# EAGLE board SparkFun_Qwiic_Audio_Amp (EAGLE 9.6.2)
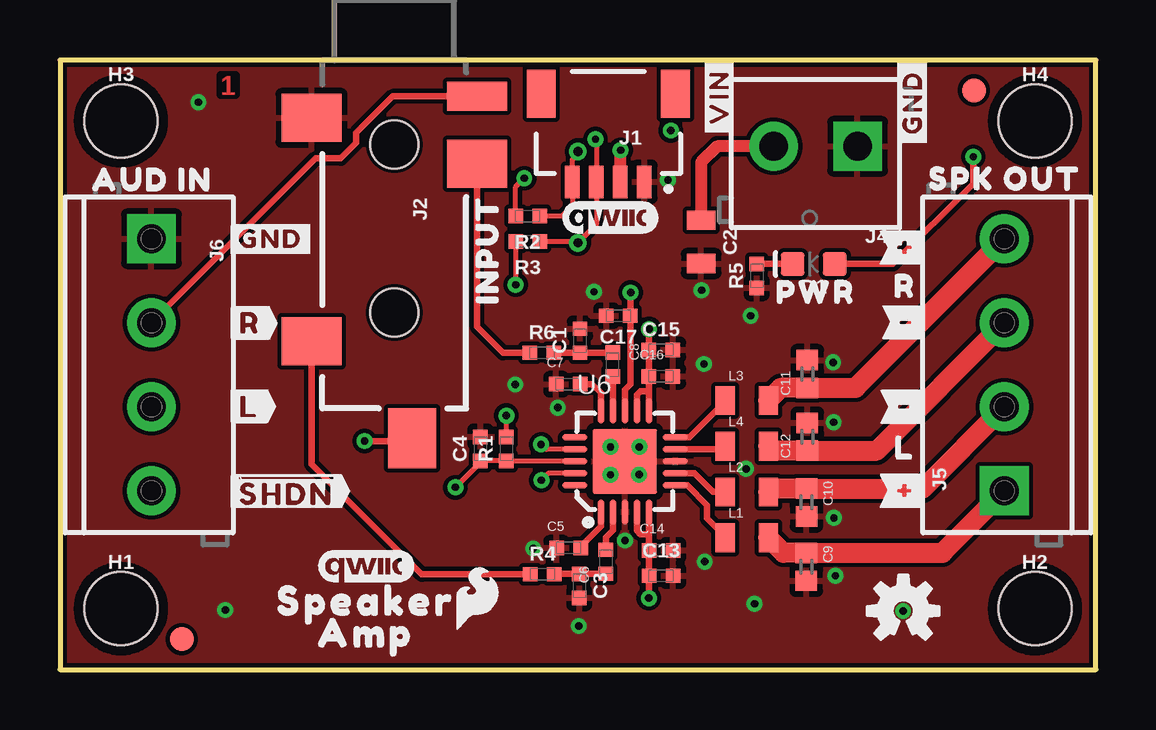
[diagram p0: board, top side]
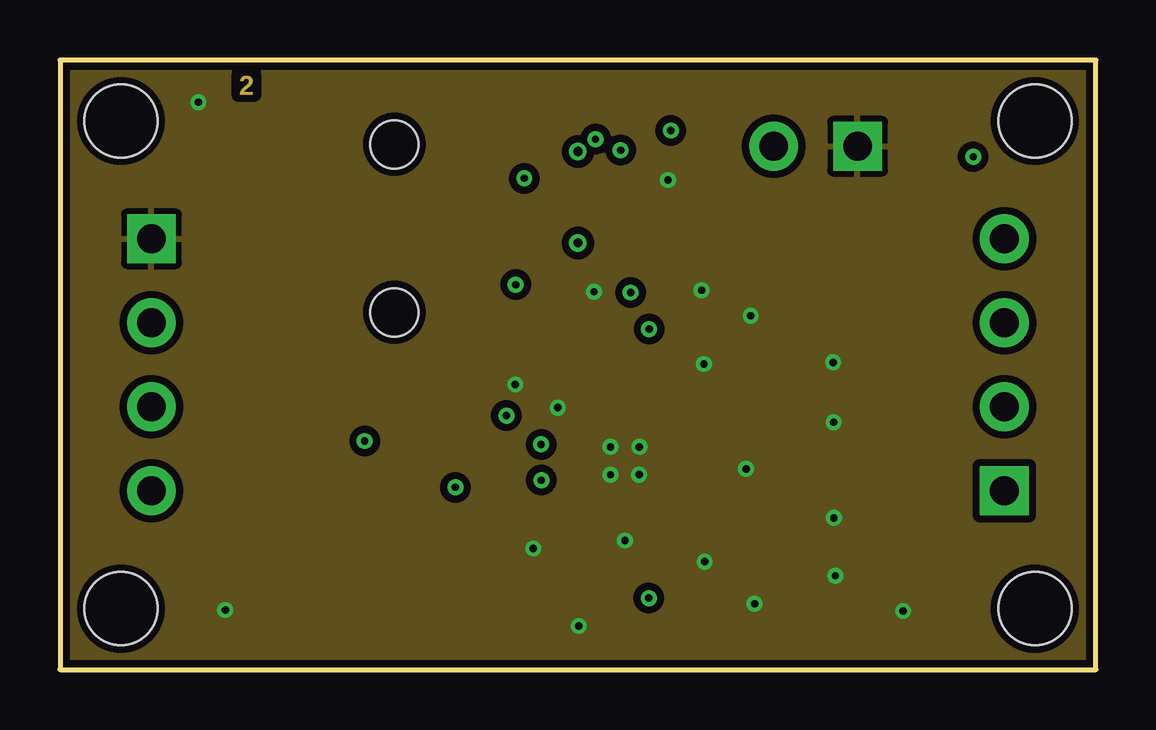
[diagram p1: board, inner layer Route2]
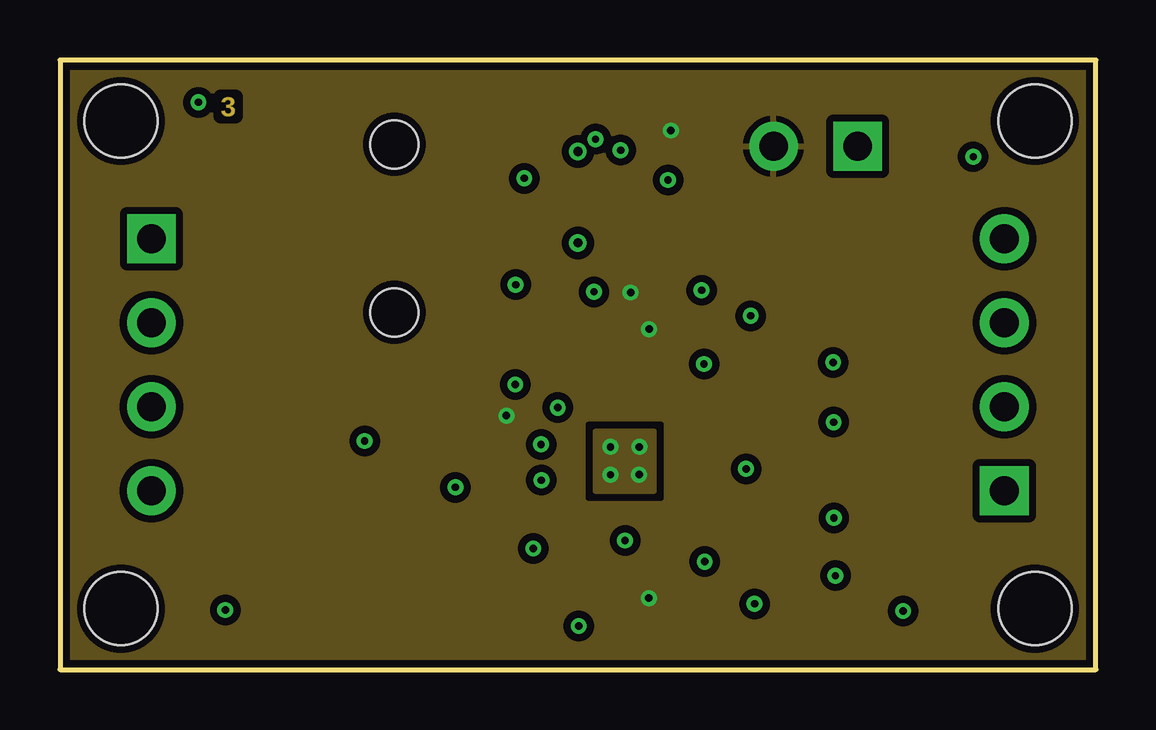
[diagram p2: board, inner layer Route15]
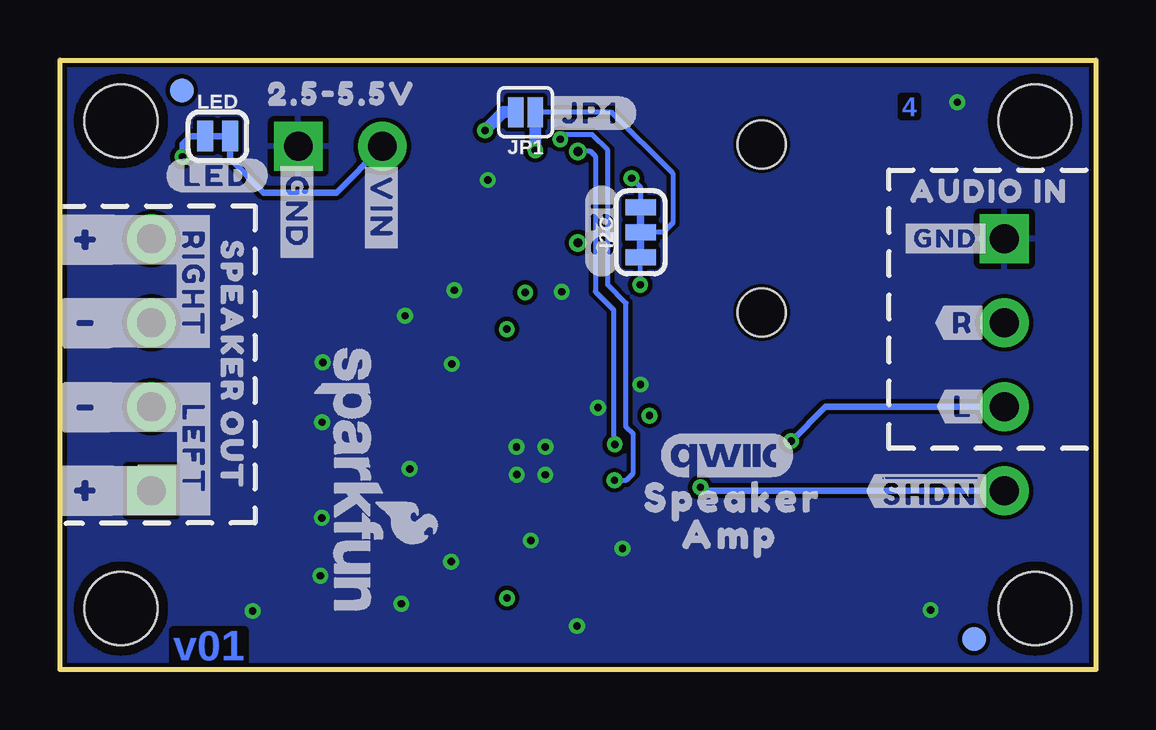
[diagram p3: board, bottom side, seen from below]

Size 43.18 x 25.4 mm. Coordinates in mm from the lower left corner, seen from the top.
Outline: 0,0 43.18,0 43.18,25.4 0,25.4 0,0
Copper layers (1+2*15+16): Top 0.035559375mm / dielectric 0.47751875mm / Route2 0.035559375mm / dielectric 0.47751875mm / Route15 0.035559375mm / dielectric 0.47751875mm / Bottom 0.035559375mm
Design rules "SparkFun-4-Layer-General-JLCPCB": minimum track width 7mil, minimum drill 12mil, track to track 7mil, track to pad 7mil, pad to pad 7mil, via to via 7mil, smd to smd 7mil, copper to edge 7mil, drill to drill 7mil, minimum pad ring 7mil, minimum via ring 7mil, stop-mask expansion 3mil, vias tented up to drill 25mil, thermal gap 10mil
Net classes: 1 VCC: width 0.254 mm, clearance 0.254 mm

## Footprints (pad centres in the part's own frame; a part is rotated, then mirrored left to right if it is on the bottom)
0402-TIGHT = smd 0.6 x 0.6: 1 -0.5,0; 2 0.5,0
0805 = smd 0.8 x 1.2: 1 -0.9,0; 2 0.9,0
0402 = smd 0.85 x 0.9: 1 -0.58,0; 2 0.58,0
LED-0603 = smd 1 x 1: A -0.877,0; C 0.877,0
FIDUCIAL-1X2 = smd 1 x 1: 1 0,0
STAND-OFF-TIGHT = hole 3.048: 0,0
SMT-JUMPER_3_2-NC_TRACE_SILK = smd 0.66 x 1.27: 1 -1.041,0; 2 0,0; 3 1.041,0
JST04_1MM_RA = smd 0.6 x 1.35: 1 -1.5,0; 2 -0.5,0; 3 0.5,0; 4 1.5,0 | smd 1.2 x 2: NC1 2.8,-3.675; NC2 -2.8,-3.675
AUDIO-JACK-3.5MM-SMD = smd 2 x 2.5: RING 4.3,3.45; SLEEVE 2.4,-3.45; TIP 11.7,-3.45 | smd 1.2 x 2.5: RSH 1.5,3.45 | smd 2.5 x 2: TSH 15.75,0.75 | hole 2: 3.5,0; 10.5,0
SCREWTERMINAL-3.5MM-2 = drill 1.2 pad 2.032 square: 1 0,0 | drill 1.2 pad 2.032: 2 3.5,0
SCREWTERMINAL-3.5MM-4 = drill 1.2 pad 2.032 square: 1 0,0 | drill 1.2 pad 2.032: 2 3.5,0; 3 7,0; 4 10.5,0
SMT-JUMPER_2_NO_SILK = smd 0.635 x 1.27: 1 -0.406,0; 2 0.406,0
SMT-JUMPER_2_NC_TRACE_SILK = smd 0.66 x 1.27: 1 -0.521,0; 2 0.521,0
TP_15TH = drill 0.381 pad 0.61: 1 0,0
QFN-20-0.5MM = smd 0.28 x 1.05: 1 -1,-2.1; 2 -0.5,-2.1; 3 0,-2.1; 4 0.5,-2.1; 5 1,-2.1; 11 1,2.1; 12 0.5,2.1; 13 0,2.1; 14 -0.5,2.1; 15 -1,2.1 | smd 1.05 x 0.28: 6 2.1,-1; 7 2.1,-0.5; 8 2.1,0; 9 2.1,0.5; 10 2.1,1; 16 -2.1,1; 17 -2.1,0.5; 18 -2.1,0; 19 -2.1,-0.5; 20 -2.1,-1 | smd 2.7 x 2.7: PAD 0,0

## Placement (x,y rotation side)
C1  47nF  [0402-TIGHT]  21.68,13.7 90 top
C2  10uF  [0805]  26.73,17.82 270 top
C3  47nF  [0402-TIGHT]  21.65,3.49 270 top
C4  0.1uF  [0402-TIGHT]  17.53,9.19 90 top
C5  1.0uF  [0402-TIGHT]  21.2,5.07 0 top
C6  1.0uF  [0402-TIGHT]  22.75,4.49 90 top
C7  1.0uF  [0402-TIGHT]  21.19,11.89 0 top
C8  1.0uF  [0402-TIGHT]  23.04,12.71 270 top
C9  1nF  [0402]  31.11,4.28 270 top
C10  1nF  [0402]  31.12,6.96 270 top
C11  1nF  [0402]  31.15,12.32 90 top
C12  1nF  [0402]  31.15,9.7 90 top
C13  1.0uF  [0402-TIGHT]  25.05,3.91 0 top
C14  0.1uF  [0402-TIGHT]  25.05,4.97 0 top
C15  1.0uF  [0402-TIGHT]  25.05,13.32 0 top
C16  0.1uF  [0402-TIGHT]  25.05,12.22 0 top
C17  0.1uF  [0402-TIGHT]  23.28,14.74 180 top
D1  RED  [LED-0603]  31.42,16.9 180 top
FD1  FIDUCIAL1X2  [FIDUCIAL-1X2]  5.08,1.27 0 top
FD2  FIDUCIAL1X2  [FIDUCIAL-1X2]  5.08,1.27 0 bottom
FD3  FIDUCIAL1X2  [FIDUCIAL-1X2]  38.1,24.13 0 top
FD4  FIDUCIAL1X2  [FIDUCIAL-1X2]  38.1,24.13 0 bottom
FRAME2  FRAME-LETTER  [CREATIVE_COMMONS]  -7.62,-20.32 0 top  (outside the outline)
H1  STAND-OFFTIGHT  [STAND-OFF-TIGHT]  2.54,2.54 0 top
H2  STAND-OFFTIGHT  [STAND-OFF-TIGHT]  40.64,2.54 0 top
H3  STAND-OFFTIGHT  [STAND-OFF-TIGHT]  2.54,22.86 0 top
H4  STAND-OFFTIGHT  [STAND-OFF-TIGHT]  40.64,22.86 0 top
I2C  JUMPER-SMT_3_2-NC_TRACE_SILK  [SMT-JUMPER_3_2-NC_TRACE_SILK]  18.97,18.22 90 bottom
J1  QWIIC  [JST04_1MM_RA]  22.86,20.32 180 top
J2  TRS_INPUT  [AUDIO-JACK-3.5MM-SMD]  13.94,25.39 270 top
J4  [SCREWTERMINAL-3.5MM-2]  33.25,21.81 180 top
J5  [SCREWTERMINAL-3.5MM-4]  39.37,7.45 90 top
J6  SCREW  [SCREWTERMINAL-3.5MM-4]  3.81,17.95 270 top
JP1  JP1  [SMT-JUMPER_2_NO_SILK]  23.77,23.22 180 bottom
L1  220Ω  [0805]  28.63,5.5 0 top
L2  220Ω  [0805]  28.63,7.4 0 top
L3  220Ω  [0805]  28.63,11.21 0 top
L4  220Ω  [0805]  28.63,9.31 0 top
LED  [SMT-JUMPER_2_NC_TRACE_SILK]  36.61,22.23 0 bottom
LOGO1  QWIIC_LOGO_4MM  [QWIIC_4MM]  12.77,4.29 0 top
LOGO2  SFE_LOGO_NAME_FLAME.1_INCH  [SFE_LOGO_NAME_FLAME_.1]  31.12,7.85 270 bottom
LOGO3  QWIIC_LOGO_4MM  [QWIIC_4MM]  22.95,18.82 0 top
LOGO4  OSHW-LOGOS  [OSHW-LOGO-S]  35.15,2.45 0 top
LOGO5  SFE_LOGO_FLAME.1_INCH  [SFE_LOGO_FLAME_.1]  17.38,2.97 0 top
LOGO6  SPECIAL_INSTRUCTIONS-ORDERING  [ORDERING_INSTRUCTIONS]  55.88,44.45 0 top  (outside the outline)
R1  100k  [0402-TIGHT]  18.61,9.2 90 top
R2  2.2k  [0402-TIGHT]  19.49,18.9 180 top
R3  2.2k  [0402-TIGHT]  19.49,17.84 180 top
R4  100  [0402-TIGHT]  20.11,3.97 0 top
R5  1k  [0402-TIGHT]  29.04,16.4 90 top
R6  100  [0402-TIGHT]  20.09,13.2 0 top
TP1  [TP_15TH]  21.59,21.59 0 top
TP2  [TP_15TH]  21.59,17.78 0 top
U6  TPA2016D2  [QFN-20-0.5MM]  23.55,8.67 0 top
U$1  [SPEAKER0]  12.76,2.85 0 top
U$2  [#I2C#0]  20.59,18.28 270 bottom
U$3  [INPUT0]  17.81,17.52 90 top
U$4  [SPEAKER0]  15.12,7.15 0 bottom
U$5  [PWR26]  31.5,15.73 0 top
U$6  [AMP0]  12.75,1.52 0 top
U$7  [QWIIC_5.5MM]  15.37,8.93 0 bottom
U$8  [AMP0]  15.25,5.63 0 bottom
U$9  [###15]  35.26,7.45 0 top
U$10  [###16]  35.3,14.47 0 top
U$11  [###16]  35.23,10.95 0 top
U$12  [###15]  35.27,17.58 0 top
U$13  [##SHDN##3]  6.91,7.44 0 bottom
U$14  [R21]  35.23,15.98 0 top
U$15  [#VIN#24]  27.48,23.85 90 top
U$16  [L5]  35.22,9.25 0 top
U$17  [#R#11]  7.92,14.44 0 top
U$18  [#L#33]  5.52,10.97 0 bottom
U$19  [#L#12]  7.89,10.96 0 top
U$20  [#GND#25]  35.54,23.63 90 top
U$21  [SPK_OUT22]  39.41,20.45 0 top
U$22  [AUD_IN23]  3.85,20.41 0 top
U$23  [2#5#5#5V24]  31.42,23.99 0 bottom
U$24  [#LED#27]  36.63,20.58 0 bottom
U$25  [#GND#25]  8.78,17.95 0 top
U$26  [#VIN#30]  29.78,19.24 270 bottom
U$27  [#GND#31]  33.31,19.07 270 bottom
U$28  [#R#34]  5.54,14.45 0 bottom
U$29  [#GND#25]  6.26,17.96 0 bottom
U$31  [###40]  42.04,17.91 0 bottom
U$32  [###40]  42.04,7.45 0 bottom
U$33  [SPEAKER_OUT37]  36.02,12.68 270 bottom
U$34  [AUDIO_IN39]  4.45,19.94 0 bottom
U$35  [###41]  42.04,14.44 0 bottom
U$36  [###41]  42.04,10.92 0 bottom
U$37  [#LEFT#43]  37.61,9.17 270 bottom
U$38  [#RIGHT#44]  37.63,16.06 270 bottom
U$39  [#JP1#2]  21.07,23.19 0 bottom
U$40  [##SHDN##2]  9.44,7.45 0 top

## Library data of the parts
C1 C3 = SparkFun-Capacitors; PROD_ID: CAP-14243
C2 = SparkFun-Capacitors; PROD_ID: CAP-14259
C4 C14 C16 C17 = SparkFun-Capacitors; PROD_ID: CAP-16507
C5-C8 C13 C15 = SparkFun-Capacitors; PROD_ID: CAP-12417
C9-C12 = SparkFun-Capacitors; PROD_ID: CAP-15061
D1 = SparkFun-LED; PROD_ID: DIO-00819
FD1-FD4 FRAME2 LOGO1-LOGO5 U$7 = SparkFun-Aesthetics
H1-H4 = SparkFun-Hardware
I2C JP1 LED = SparkFun-Jumpers
J1 = SparkFun-Connectors; PROD_ID: CONN-13694
J2 = SparkFun-Connectors; PROD_ID: CONN-10353
J4 = SparkFun-Connectors; PROD_ID: CONN-08399
J5 J6 = SparkFun-Connectors; PROD_ID: CONN-14485
L1-L4 = SparkFun-Coils; PROD_ID: NDUC-10201
LOGO6 = SparkFun-Aesthetics; PROD_ID: PCB-17002
R1 = SparkFun-Resistors; PROD_ID: RES-13495
R2 R3 = SparkFun-Resistors; PROD_ID: RES-14341
R4 R6 = SparkFun-Resistors; PROD_ID: RES-14962
R5 = SparkFun-Resistors; PROD_ID: RES-14342
TP1 TP2 = SparkFun-Connectors
U6 = temp; PROD_ID: IC-11061
U$1-U$6 U$8-U$29 U$31-U$40 = output

## Nets
3.3V: I2C.2 J1.2 JP1.1
GND: C1.2 C2.2 C3.2 C4.2 C5.1 C7.1 C9.2 C10.2 C11.2 C12.2 C13.2 C14.2 C15.2 C16.2 C17.2 J1.1 J2.SLEEVE J4.1 J6.1 R5.1 U6.3 U6.8 U6.PAD
INL: J2.TIP R4.1
INL_SCRWPN: J2.TSH J6.3
INR: J2.RING R6.1
INR_SCRWPN: J2.RSH J6.2
N$1: L1.1 U6.6
N$2: L2.1 U6.7
N$3: C1.1 C8.1 R6.2
N$4: D1.C R5.2
N$5: C3.1 C6.1 R4.2
N$6: D1.A LED.1
N$16: I2C.3 R2.2
N$17: I2C.1 R3.2
N$18: L3.1 U6.10
N$19: L4.1 U6.9
N$20: C8.2 U6.14
N$21: C5.2 U6.1
N$22: C6.2 U6.2
N$25: C7.2 U6.15
SCL: J1.4 R2.1 TP1.1 U6.17
SDA: J1.3 R3.1 TP2.1 U6.19
SDZ: C4.1 J6.4 R1.1 U6.18
SPK_L_+: C9.1 J5.1 L1.2
SPK_L_-: C10.1 J5.2 L2.2
SPK_R_+: C11.1 J5.4 L3.2
SPK_R_-: C12.1 J5.3 L4.2
VCC: C2.1 C13.1 C14.1 C15.1 C16.1 C17.1 J4.2 JP1.2 LED.2 R1.2 U6.4 U6.5 U6.11 U6.12 U6.13

## Tracks (layer width: path | path; a pad name or v marks a point on that pad's centre or on a via)
3.3V  (via drill 0.3)
  Top 0.508: J1.2 v23.37,21.64
  Bottom 0.203: I2C.2 18.03,18.22 17.64,18.61 17.64,20.67 20.18,23.22 JP1.1
  Bottom 0.508: JP1.1 v23.37,21.64
GND  (via drill 0.3)
  other vias: 5.77,23.64 32.23,12.8 32.25,10.31 32.26,6.32 32.32,3.91 24.15,9.28 22.95,9.28 22.95,8.12 24.14,8.12 28.79,14.74 26.85,12.73 23.55,5.38 28.6,8.36 28.95,2.74 26.87,4.5 19.73,5.05 20.75,10.92 22.26,15.74 25.35,20.4 21.63,1.82 6.89,2.48 35.15,2.44 26.74,15.81 18.98,11.88
  pour Top: 0,0 43.09,0 43.09,25.52 0,25.52
  pour Bottom (isolate 0.012): 43.09,0 0,0 0,25.52 43.09,25.52
  pour Bottom (isolate 0.305): 0,0 0,25.4 43.18,25.4 43.18,0
  pour Route15 (isolate 0.305): 22.3,9.92 22.3,7.43 24.79,7.43 24.79,9.92
  pour Route2 (isolate 0.305): 0,0 0,25.4 43.18,25.4 43.18,0
INL
  Top 0.279: R4.1 15.08,3.97 10.49,8.56 J2.TIP
INL_SCRWPN  (via drill 0.3)
  Top 0.279: v12.7,9.53 14.57,9.53 J2.TSH
  Bottom 0.279: J6.3 11.28,10.95 v12.7,9.53
INR
  Top 0.279: J2.RING 17.39,14.28 18.47,13.2 R6.1
INR_SCRWPN
  Top 0.279: J2.RSH 13.88,23.89 12.35,22.36 12.35,21.95 11.7,21.3 10.66,21.3 J6.2
N$1
  Top 0.279: U6.6 26.15,7.67 26.98,6.85 26.98,6.3 27.73,5.55 L1.1
N$2
  Top 0.279: U6.7 26.45,8.17 27.22,7.4 L2.1
N$3
  Top 0.279: C8.1 C1.1 R6.2
N$4
  Top 0.279: D1.C R5.2
N$5
  Top 0.279: R4.2 20.63,3.99 C3.1 C6.1
N$6  (via drill 0.3)
  Top 0.279: D1.A 34.73,16.9 38.07,20.25 v38.07,21.37
  Bottom 0.279: v38.07,21.37 38.07,21.91 37.76,22.23 LED.1
N$16  (via drill 0.3)
  Top 0.203: R2.2 18.99,20.11 v19.35,20.47
  Bottom 0.203: v19.35,20.47 18.97,20.09 I2C.3
N$17  (via drill 0.3)
  Top 0.203: R3.2 v18.99,16.04
  Bottom 0.203: v18.99,16.04 18.97,16.06 I2C.1
N$18
  Top 0.279: U6.10 26.25,9.67 27.73,11.15 L3.1
N$19
  Top 0.279: U6.9 27.59,9.17 L4.1
N$20
  Top 0.279: U6.14 C8.2
N$21
  Top 0.279: U6.1 22.55,5.97 21.7,5.12 C5.2
N$22
  Top 0.279: U6.2 23.05,5.81 22.77,5.53 22.77,5.01 C6.2
N$25
  Top 0.279: U6.15 22.55,11.53 22.18,11.89 C7.2
SCL  (via drill 0.3)
  Top 0.203: U6.17 20.27,9.17 v20.06,9.38 | R2.1 20.9,18.89 21.36,19.36 J1.4 21.36,21.25 21.59,21.48 TP1.1
  Bottom 0.203: v20.06,9.38 20.1,9.43 20.1,14.99 20.87,15.75 20.87,21.4 21.06,21.59 TP1.1
SDA  (via drill 0.3)
  Top 0.203: U6.19 20.35,8.17 v20.07,7.89 | v22.32,22.1 22.36,22.07 J1.3 22.36,18.55 TP2.1 21.53,17.84 R3.1
  Bottom 0.203: v20.07,7.89 19.58,7.89 19.28,8.19 19.28,9.81 19.58,10.11 19.58,15.27 20.34,16.03 20.34,21.63 21,22.29 22.13,22.29 v22.32,22.1
SDZ  (via drill 0.3)
  Top 0.203: U6.18 18.61,8.67 R1.1 C4.1 17.53,8.64 v16.48,7.59
  Bottom 0.279: J6.4 16.34,7.45 v16.48,7.59
SPK_L_+
  Top 0.838: J5.1 36.78,4.86 C9.1 30.16,4.86 L1.2
SPK_L_-
  Top 0.838: J5.2 35.97,7.54 C10.1 29.67,7.54 L2.2
SPK_R_+
  Top 0.838: J5.4 33.16,11.74 C11.1 30.05,11.74 L3.2
SPK_R_-
  Top 0.838: J5.3 34.04,9.12 C12.1 29.71,9.12 L4.2
VCC  (via drill 0.3)
  Top 0.203: R1.2 v18.61,10.58
  Top 0.279: U6.5 24.55,5.65 | 24.55,5.65 C14.1 C13.1 | C13.1 | C13.1 v24.55,2.98 | 24.05,6.14 U6.4 24.05,5.8 24.2,5.65 24.55,5.65 | U6.11 24.55,11.6 | 24.55,11.6 C16.1 C15.1 | C15.1 | v23.79,15.71 23.78,15.7 C17.1 23.78,11.88 23.55,11.66 U6.13 | 24.55,11.6 24.19,11.6 24.05,11.46 U6.12 | C15.1 24.55,14.18 v24.56,14.19
  Top 0.508: J4.2 27.4,21.81 26.73,21.13 C2.1
  Bottom 0.279: LED.2 36.09,21.28 34.69,19.87 31.65,19.87 29.75,21.78 J4.2
  Bottom 0.508: JP1.2 24.7,23.22 v25.46,22.46
  pour Route15 (isolate 0.305, rank 2): 0,0 0,25.4 43.18,25.4 43.18,0

## Text on the board
Top: 1
Route2: 2
Route15: 3
Bottom: 4 | v01
Measures: UNITS: INCHES
tDocu: Board Thickness is 1.6mm | 4-Layer | HASL Finish | Pete Lewis | Based on the Lilypad MP3 by Mike Grusin